# Altium PCB PCB.PcbDoc
Units mil, origin at the board's own origin, x right, y up, seen from the top; angles counter-clockwise.
Board outline 7375 x 8834 mil, 2 copper layers (Top Layer, Bottom Layer); 64 components, 131 nets, 608 pads, 12 vias.
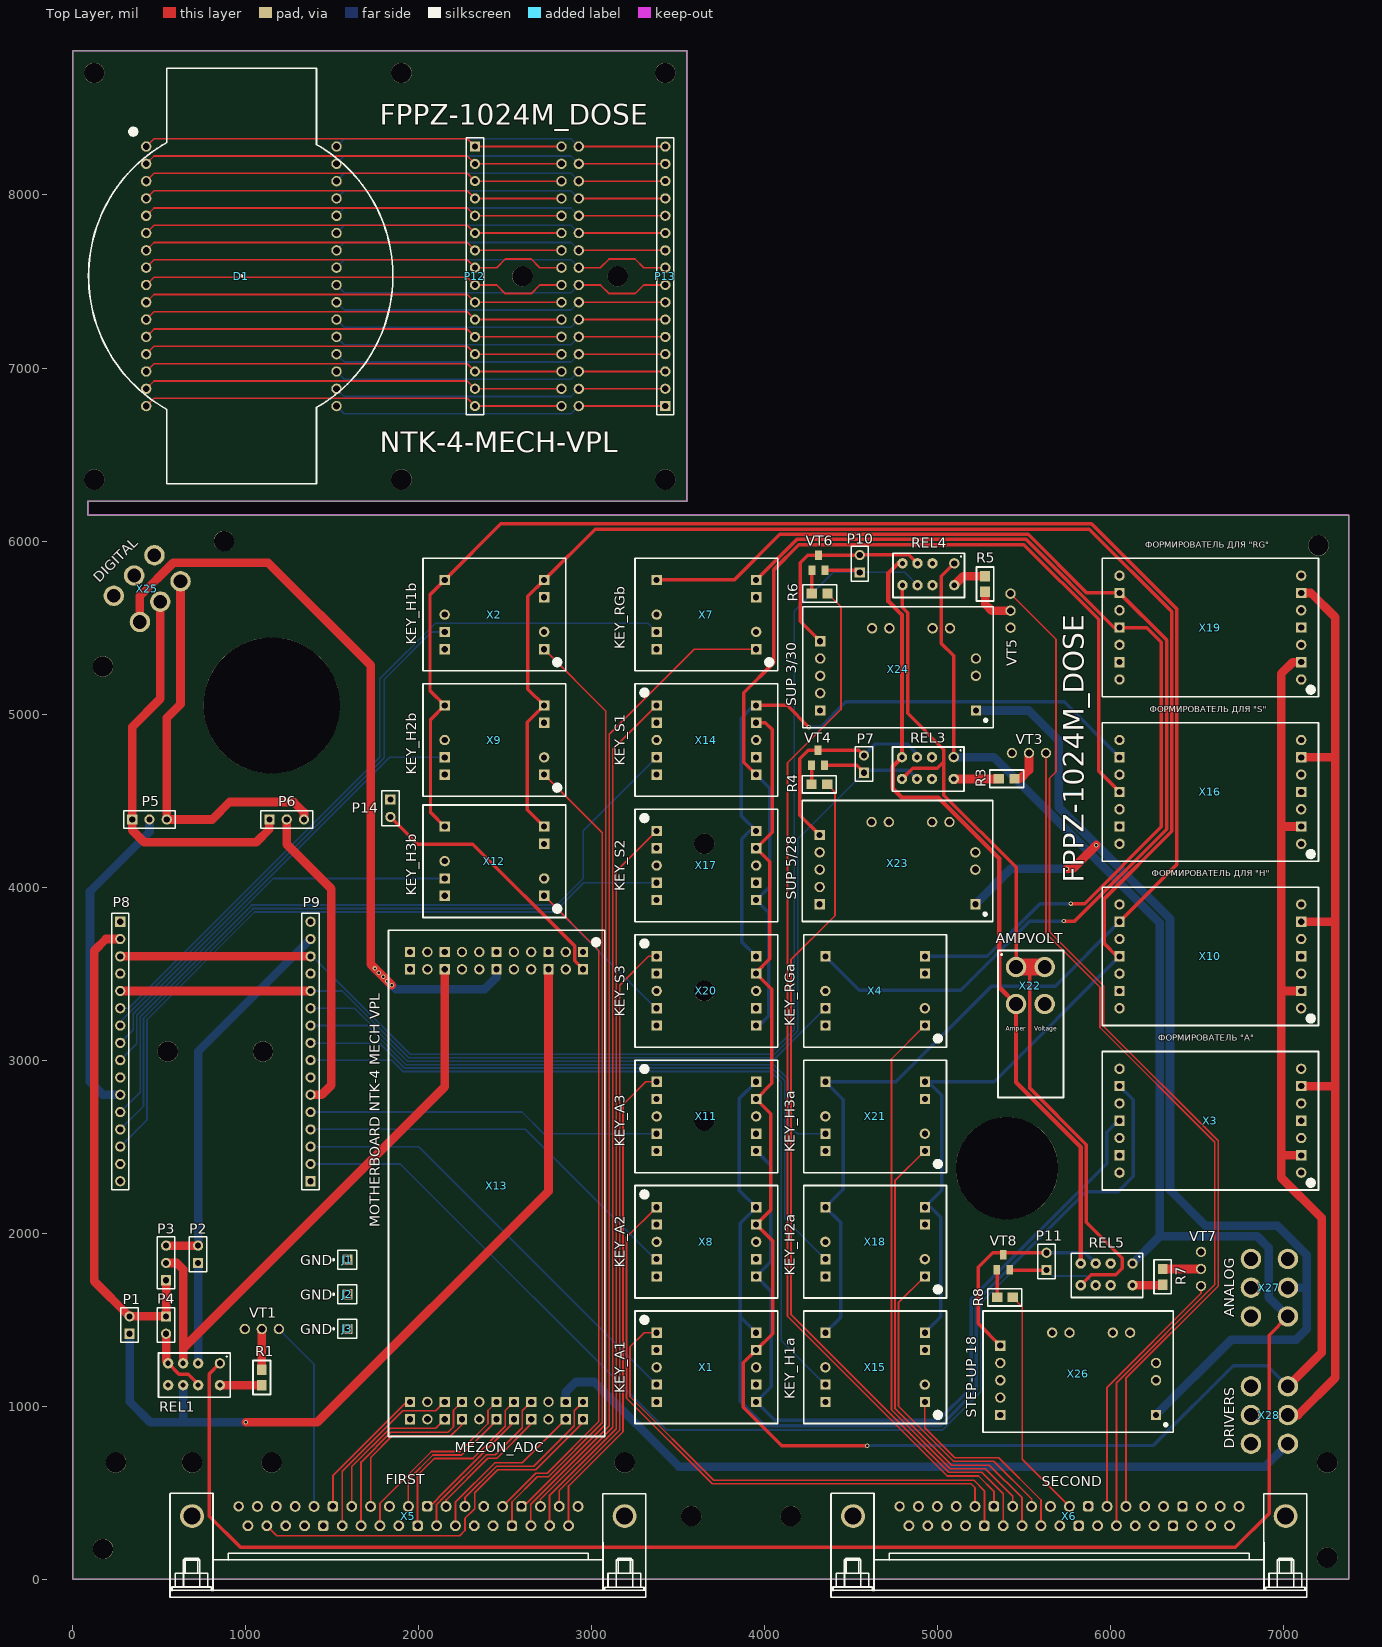
[diagram p0: Top Layer view]
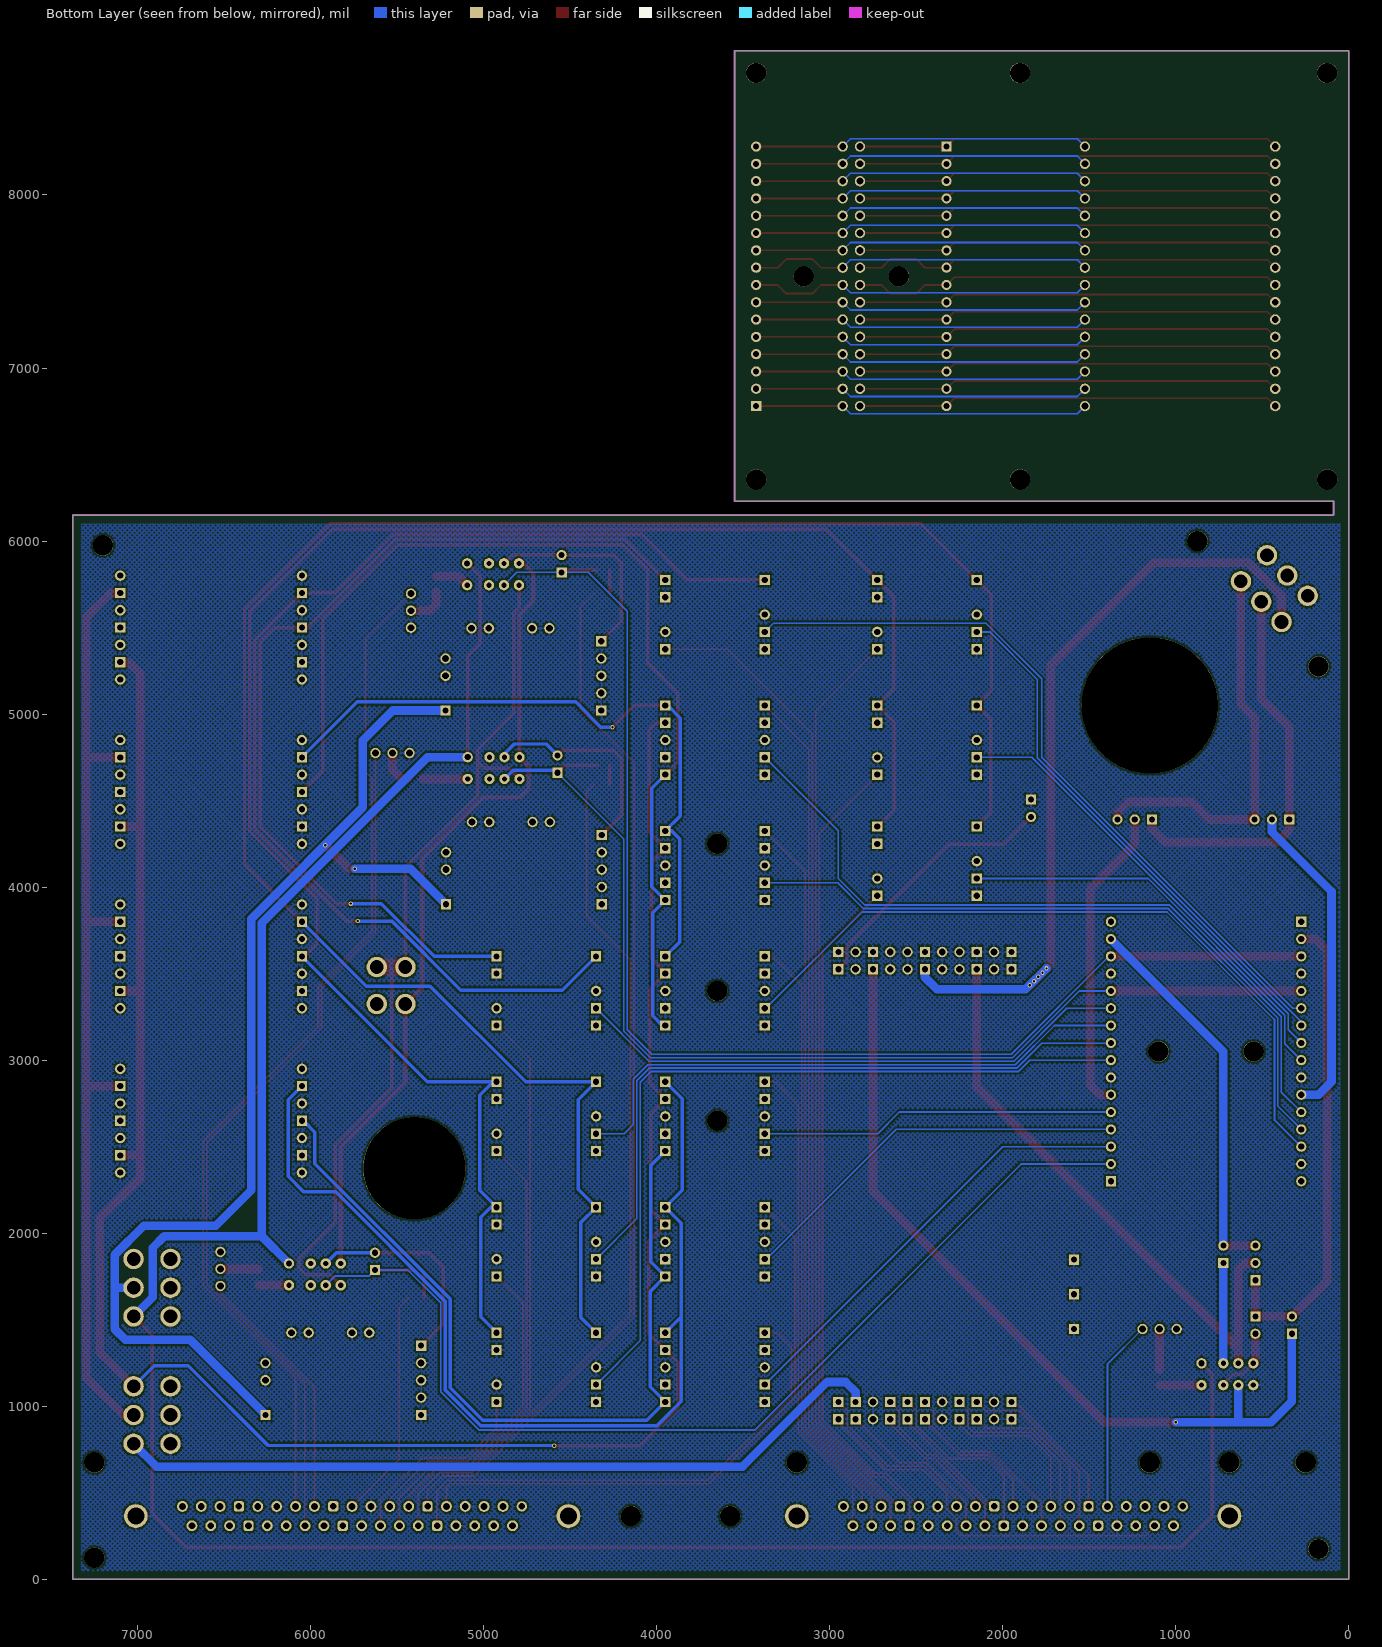
[diagram p1: Bottom Layer view, seen from below]

## Layer stack, top to bottom
Top Solder: solder mask 0.4, Solder Resist, Dk 3.5
Top Layer: signal copper 1.4
Dielectric 1: dielectric 12.6, FR-4, Dk 4.8
Bottom Layer: signal copper 1.4
Bottom Solder: solder mask 0.4, Solder Resist, Dk 3.5

## Board outline
0,0 0,8834 3550,8834 3550,6230 89,6230 88,6229 88,6151 89,6150 7375,6150 7375,0

## Design rules (kind name [scope] priority, off if disabled: settings)
Clearance [All] p1: gap=10
PolygonConnect [All] p1: connectstyle=Relief reliefconductorwidth=10 reliefentries=4 polygonreliefangle="90 Angle" airgapwidth=10
RoutingVias [All] p1: holewidth=28 width=50 viastyle="Through Hole" minholewidth=28 minwidth=50 maxholewidth=28 maxwidth=50
SolderMaskExpansion [All] p1: expansion=4
Width [All] p1: maxlimit=102.36 minlimit=5 preferedwidth=10
29 further rules are at their usual default settings.

## Classes and differential pairs
component class Sheet1: J1 J2 J3 P1 P2 P3 P4 P5 P6 P7 P8 P9 P14 R1 R3 R4 R5 R6 R7 R8 REL1 REL3 REL4 REL5 VT1 VT3 VT4 VT5 VT6 VT7 VT8 X1 X2 X3 X4 X5 X6 X7 X8 X9 X10 X11 X12 X13 X14 X15 X16 X17 X18 X19 X20 X21 X22 X23 X24 X25 X26 X27 X28
component class outdoor_plata: D1 P12 P13

## Components (designator, comment, footprint, x,y, rotation, side; value= is the part's Value field where it differs from the comment)
D1 "FPPZ 1024M" FPPZ_1024M 425,8280 r270 top
J1 "GND" PIN1 1588,1847 r90 top
J2 "GND" PIN1 1588,1647 r90 top
J3 "GND" PIN1 1588,1447 r90 top
P1 "Header 2" HDR1X2 329,1419 r90 top
P2 "Header 2" HDR1X2 725,1828 r90 top
P3 "Header 3" HDR1X3 540,1728 r90 top
P4 "Header 2" HDR1X2 540,1519 r270 top
P5 "Header 3" HDR1X3 344,4391 r0 top
P6 "Header 3" HDR1X3 1137,4391 r0 top
P7 "Header 2" HDR1X2 4573,4661.12 r90 top
P8 "Header 2" HDR1X16 275,3800 r270 top
P9 "Header 2" HDR1X16 1375,2300 r90 top
P10 "Header 2" HDR1X2 4549,5819 r90 top
P11 "Header 2" HDR1X2 5628,1787 r90 top
P12 "Header 16" HDR1X16 2325,8280 r270 top
P13 "Header 16" HDR1X16 3425,6780 r90 top
P14 "Header 2" HDR1X2 1836,4506 r270 top
R1 "51" RES 1142,1264 r180 top
R3 "51" RES 5300,4675 r270 top
R4 "100" RES 4412.86,4545 r90 top
R5 "51" RES 5322,5849 r180 top
R6 "100" RES 4415,5648 r90 top
R7 "51" RES 6250,1650 r0 top
R8 "100" RES 5485,1580 r90 top
REL1 "IM03TS" IM03TS 851,1248 r180 top
REL3 "IM03TS" IM03TS 5092,4751 r180 top
REL4 "IM03TS" IM03TS 5095,5871 r180 top
REL5 "IM03TS" IM03TS 6125,1825 r180 top
VT1 "КТ315" KT315 1192,1446 r180 top
VT3 "КТ315" KT315 5625,4775 r180 top
VT4 "IRLML0060TRPbF" SOT23-BEC_MMBT3640*(Primary) 4307,4747 r0 top
VT5 "КТ315" KT315 5420,5696 r270 top
VT6 "IRLML0060TRPbF" SOT23-BEC_MMBT3640*(Primary) 4310,5875 r0 top
VT7 "КТ315" KT315 6521,1695 r90 top
VT8 "IRLML0060TRPbF" SOT23-BEC_MMBT3640*(Primary) 5378,1832 r0 top
X1 "KEY_A1" MEZON_V 3375,1425 r0 top
X2 "KEY_H1b" MEZON_H 2725,5375 r180 top
X3 "ФОРМИРОВАТЕЛЬ \"A\"" MEZON_V+H 7100,2350 r180 top
X4 "KEY_RGa" MEZON_H 4925,3200 r180 top
X5 "FIRST" CHEAP_CONN_FEMALE 3190,365 r180 top
X6 "SECOND" CHEAP_CONN_FEMALE 7010,365 r180 top
X7 "KEY_RGb" MEZON_H 3950,5375 r180 top
X8 "KEY_A2" MEZON_V 3375,2150 r0 top
X9 "KEY_H2b" MEZON_H 2725,4650 r180 top
X10 "ФОРМИРОВАТЕЛЬ ДЛЯ \"Н\"" MEZON_V+H 7100,3300 r180 top
X11 "KEY_A3" MEZON_V 3375,2875 r0 top
X12 "KEY_H3b" MEZON_H 2725,3950 r180 top
X13 "MEZON_ADC" MEZON_ADC 2950,3625 r270 top
X14 "KEY_S1" MEZON_V 3375,5050 r0 top
X15 "KEY_H1a" MEZON_H 4925,1025 r180 top
X16 "ФОРМИРОВАТЕЛЬ ДЛЯ \"S\"" MEZON_V+H 7100,4250 r180 top
X17 "KEY_S2" MEZON_V 3375,4325 r0 top
X18 "KEY_H2a" MEZON_H 4925,1750 r180 top
X19 "ФОРМИРОВАТЕЛЬ ДЛЯ \"RG\"" MEZON_V+H 7100,5200 r180 top
X20 "KEY_S3" MEZON_V 3375,3600 r0 top
X21 "KEY_H3a" MEZON_H 4925,2475 r180 top
X22 "AMPVOLT" AMP_VOLTMETER 5452,3538 r0 top
X23 "SUP 5/28" MEZON_STEP-UP 5217,3901 r180 top
X24 "SUP 3/30" MEZON_STEP-UP 5220,5021 r180 top
X25 "DIGITAL" POWER 294,5862 r225 top
X26 "STEP-UP 18" MEZON_STEP-UP 6261,950 r180 top
X27 "ANALOG" POWER 6723,1685 r270 top
X28 "DRIVERS" POWER 6723,949 r270 top

## Footprints (in the part's own frame and the unit in brackets; to place one, negate y for a bottom-side part, rotate by r counter-clockwise, add the part's x,y. Pads: shape width x height; smd on the part's side, far side on the other; paste and mask are expansions set on the pad)
AMP_VOLTMETER [mm] "AMP_VOLTMETER"
  round 3 hole 2: 1(0,0) 2(0,-5.423) 3(4.2,-5.423) 4(4.2,0)
  silkscreen extent -2.66,-19.17 6.94,2.42
CHEAP_CONN_FEMALE [mm] "CHEAP_CONN_FEMALE"
  round 1.6 hole 1: 1(6.833,-1.422) 2(9.601,-1.422) 3(12.37,-1.422) 5(17.907,-1.422) 6(20.676,-1.422) 7(23.444,-1.422) 8(26.213,-1.422) 10(31.75,-1.422) 11(34.519,-1.422) 12(37.287,-1.422) 13(40.056,-1.422) 15(45.593,-1.422) 16(48.362,-1.422) 17(51.13,-1.422) 18(53.899,-1.422) 20(8.23,1.422) 21(10.998,1.422) 22(13.767,1.422) 24(19.304,1.422) 25(22.073,1.422) 26(24.841,1.422) 27(27.61,1.422) 29(33.147,1.422) 30(35.916,1.422) 31(38.684,1.422) 32(41.453,1.422) 34(46.99,1.422) 35(49.759,1.422) 36(52.527,1.422) 37(55.296,1.422)
  rrect50% 1.524x1.524 hole 0.965: 4(15.138,-1.422) 9(28.981,-1.422) 14(42.824,-1.422) 23(16.535,1.422) 28(30.378,1.422) 33(44.221,1.422)
  round 1.524 hole 0.965: 19(56.667,-1.422)
  round 3.5 hole 2.5: 38(0,0) 39(63.5,0)
  silkscreen extent -3.11,-3.36 66.72,11.92
FPPZ_1024M [mil]
  round 60 hole 39.37: 1(0,0) 2(100,0) 3(200,0) 4(300,0) 5(400,0) 6(500,0) 7(600,0) 8(700,0) 9(800,0) 10(900,0) 11(1000,0) 12(1100,0) 13(1200,0) 14(1300,0) 15(1400,0) 16(1500,0) 17(1500,1100) 18(1400,1100) 19(1300,1100) 20(1200,1100) 21(1100,1100) 22(1000,1100) 23(900,1100) 24(800,1100) 25(700,1100) 26(600,1100) 27(500,1100) 28(400,1100) 29(300,1100) 30(200,1100) 31(100,1100) 32(0,1100)
  silkscreen extent -453,-333 1949,1425
HDR1X2 [mm] "Connector; Header; 2 Position"
  rect 1.5x1.5 hole 0.9: 1(0,0)
  round 1.5 hole 0.9: 2(2.54,0)
  silkscreen extent -1.27,-1.27 3.81,1.27
HDR1X3 [mm] "Connector; Header; 3 Position"
  rect 1.5x1.5 hole 0.9: 1(0,0)
  round 1.5 hole 0.9: 2(2.54,0) 3(5.08,0)
  silkscreen extent -1.27,-1.27 6.35,1.27
HDR1X16 [mm] "Connector; Header; 16 Position"
  rect 1.5x1.5 hole 0.9: 1(0,0)
  round 1.5 hole 0.9: 2(2.54,0) 3(5.08,0) 4(7.62,0) 5(10.16,0) 6(12.7,0) 7(15.24,0) 8(17.78,0) 9(20.32,0) 10(22.86,0) 11(25.4,0) 12(27.94,0) 13(30.48,0) 14(33.02,0) 15(35.56,0) 16(38.1,0)
  silkscreen extent -1.27,-1.27 39.37,1.27
IM03TS [mil] "IM03TS"
  round 60 hole 35.43: 1(0,0)
  round 60 hole 30: 2(125.98,0) 3(212.6,0) 4(299.21,0) 5(299.21,125.98) 6(212.6,125.98) 7(125.98,125.98) 8(0,125.98)
  silkscreen extent -59,-59 354,197
KT315 [mil] "KT315"
  round 60 hole 39.37: 1(0,0) 2(98.43,0) 3(196.85,0)
MEZON_ADC [mm] "MEZON_ADC"
  rect 1.5x1.5 hole 0.9: 1(0,0) 2(2.54,0) 5(0,-5.08) 6(2.54,-5.08) 11(0,-12.7) 12(2.54,-12.7) 17(0,-20.32) 18(2.54,-20.32) 21(0,-25.4) 22(2.54,-25.4) 23(66.04,-25.4) 24(68.58,-25.4) 27(66.04,-20.32) 28(68.58,-20.32) 29(66.04,-17.78) 30(68.58,-17.78) 33(66.04,-12.7) 34(68.58,-12.7) 35(66.04,-10.16) 36(68.58,-10.16) 37(66.04,-7.62) 38(68.58,-7.62) 41(66.04,-2.54) 42(68.58,-2.54) 43(66.04,0) 44(68.58,0)
  round 1.524 hole 1: 3(0,-2.54) 4(2.54,-2.54) 7(0,-7.62) 8(2.54,-7.62) 9(0,-10.16) 10(2.54,-10.16) 13(0,-15.24) 14(2.54,-15.24) 15(0,-17.78) 16(2.54,-17.78) 19(0,-22.86) 20(2.54,-22.86) 25(66.04,-22.86) 26(68.58,-22.86) 31(66.04,-15.24) 32(68.58,-15.24) 39(66.04,-5.08) 40(68.58,-5.08)
  silkscreen extent -3.18,-28.57 71.12,3.18
MEZON_H [mm]
  rect 1.5x1.5 hole 0.9: 1(0,0) 3(0,-7.62) 4(0,-10.16) 5(14.605,-10.16) 7(14.605,-2.54) 8(14.605,0)
  round 1.524 hole 0.9: 2(0,-2.54) 6(14.605,-5.08)
  silkscreen extent -3.18,-13.33 17.78,3.18
MEZON_STEP-UP [mil] "MEZON_STEP-UP"
  rect 59.06x59.06 hole 35.43: 1(0,0) 8(900,-400) 12(900,0)
  round 60 hole 39.37: 2(0,-200) 3(0,-300) 4(150,-475) 5(250,-475) 6(500,-475) 7(600,-475) 9(900,-300) 10(900,-200) 11(900,-100)
  silkscreen extent -100,-600 1000,100
MEZON_V [mm]
  rect 1.5x1.5 hole 0.9: 1(0,0) 2(0,-2.54) 4(0,-7.62) 5(0,-10.16) 6(14.605,-10.16) 7(14.605,-7.62) 9(14.605,-2.54) 10(14.605,0)
  round 1.524 hole 0.9: 3(0,-5.08) 8(14.605,-5.08)
  silkscreen extent -3.17,-13.33 17.78,3.17
MEZON_V+H [mm] "MEZON_V+H"
  round 1.524 hole 0.9: 1(0,0) 3(0,-5.08) 5(0,-10.16) 7(0,-15.24) 8(26.67,-15.24) 10(26.67,-10.16) 12(26.67,-5.08) 14(26.67,0)
  rect 1.5x1.5 hole 0.9: 2(0,-2.54) 4(0,-7.62) 6(0,-12.7) 9(26.67,-12.7) 11(26.67,-7.62) 13(26.67,-2.54)
  silkscreen extent -2.54,-17.78 29.21,2.54
PIN1 [mm] "Connector; Plug"
  rect 1.5x1.5 hole 0.9: 1(0,0)
  silkscreen extent -1.4,-1.4 1.4,2.17
POWER [mm] "POWER"
  round 3 hole 2: 1(4.218,7.62) 2(0,7.62) 3(-4.218,7.62) 4(4.218,2.198) 5(0,2.198) 6(-4.218,2.198)
RES [mil] "FROM_MAX"
  rect 55.98x60 smd: 1(49,52.71) 2(49,142.71)
  silkscreen extent -1,0 99,196, body extent 17,19 81,177, height 100
SOT23-BEC_MMBT3640*(Primary) [mm]
  rect 1x1.4 smd: 1(-0.95,-1.1) 2(0.95,-1.1) 3(0,1.1)

## Part data
J1 J2 J3: library part Socket, "Socket"
P1 P2 P4 P7 P10 P11 P14: "Header, 2-Pin"
P3 P5 P6: "Header, 3-Pin"
P8 P9: library part "Header 16", "Header, 16-Pin"
P12 P13: "Header, 16-Pin"
R1 R3 R4 R5 R6 R7 R8: library part RES
X1 X8 X11 X14 X17 X20: library part MEZON_V
X2 X4 X7 X9 X12 X15 X18 X21: library part MEZON_H
X3 X10 X16 X19: library part MEZON_V+H
X5 X6: library part CHEAP_CON_37_FEMALE
X22: library part AMP_VOLTMETER
X23 X24 X26: library part MEZON_STEP-UP
X25 X27 X28: library part POWER

## Free pads (board coordinates)
  round 118.11 hole 118.11 unplated: 0(125,6355) 0(125,8705) 0(175,175) 0(175,5275) 0(250,675) 0(550,3050) 0(690,675) 0(875,6000) 0(1100,3050) 0(1150,675) 0(1900,6355) 0(1900,8705) 0(2600,7530) 0(3150,7530) 0(3190,675) 0(3425,6355) 0(3425,8705) 0(3575,365) 0(3650,2650) 0(3650,3400) 0(3650,4250) 0(4150,365) 0(7200,5975) 0(7250,125) 0(7250,675)
  round 787.4 hole 787.4 unplated: 0(1150,5050)
  round 60 hole 39.37: 0(2825,6780) 0(2825,6880) 0(2825,6980) 0(2825,7080) 0(2825,7180) 0(2825,7280) 0(2825,7380) 0(2825,7480) 0(2825,7580) 0(2825,7680) 0(2825,7780) 0(2825,7880) 0(2825,7980) 0(2825,8080) 0(2825,8180) 0(2825,8280) 0(2925,6780) 0(2925,6880) 0(2925,6980) 0(2925,7080) 0(2925,7180) 0(2925,7280) 0(2925,7380) 0(2925,7480) 0(2925,7580) 0(2925,7680) 0(2925,7780) 0(2925,7880) 0(2925,7980) 0(2925,8080) 0(2925,8180) 0(2925,8280)
  round 590.55 hole 590.55 unplated: 0(5400,2375)

## Via types
v1: diameter 25.59, hole 13.78, Top Layer to Bottom Layer, 12 vias

## Nets (pads, with @x,y where several pads share a name; then routed paths per layer and width w, separated by ;. In a path a pad name is that pad's centre, name@x,y a point inside that pad or via, vN(x,y) a via of type N, cw(c..) or ccw(c..) an arc to the next point about the centre after c; other vN are vias at no path point)
"AMPER_3 AND 30": VT5.1 X6.7 | length 6024.3
  Top Layer w10: VT5.1 5683,5433 5683,4667 5645,4629 5645,3742 5957,3430 5957,3197 6620,2534 6620,1695 6087,1162 X6.7
"AMPER_5 AND 28": VT3.1 X6.26 | length 5104.7
  Top Layer w10: VT3.1 5625,3733.72 5937,3421.72 5937,3188.72 6600,2525.72 6600,1703.28 6033,1136.28 X6.26@6033,309
AMPER_18: VT7.1 X6.8 | length 1498.9
  Top Layer w10: X6.8 5978,1109.57 6521,1652.57 VT7.1
AMPER_+: REL3.4 REL4.4 REL5.4 X22.2 | length 4722.6
  Top Layer w25: REL4.4 4770,5871 4714,5815 4714,5652 4792.79,5573.21 REL3.4 4740.29,4698.5 4740.29,4568.71 4791,4518 5002.04,4518 5355,4165.04 5355,3421.5 X22.2 5452,2872 5825.79,2498.21 REL5.4
AMPER_-: REL3.5 REL4.5 REL5.5 X22.1 X22.4 | length 5174.1
  Top Layer w20: REL3.5 4854.77,4687 4997,4687 5035,4725 ; REL4.5 4795,5744.23 4795,5616.96 4825.29,5586.67 4825.29,5004 5035,4794.29 5035,4725 ; X22.1 5452,4114 5035,4531 5035,4725 ; 5538,3538 5531.06,3531.06 5531.06,2838.91 5858.29,2511.67 5858.29,2062.71 6066,1855 6066,1798 6028,1760 5886.77,1760 REL5.5
  Top Layer w100: X22.1 5538,3538 X22.4
"DIRECTLY_3 AND 30": R6.1 X6.14 | length 6035.6
  Top Layer w10: R6.1 4440,5619.29 4440,5027 4131,4718 4131,1521 5055,597 5234.72,597 5324,507.72 X6.14
"DIRECTLY_5 AND 28": R4.1 X6.32 | length 5028.6
  Top Layer w10: R4.1 4406,4548.15 4406,3835 4151,3580 4151,1532 5064.08,618.92 5253.08,618.92 5378,494 X6.32
DIRECTLY_18: R8.1 X6.10 | length 1343.7
  Top Layer w10: R8.1 5488,1573.29 5488,693 X6.10
GND: J1.1 J2.1 J3.1 P8.4 P8.10 P8.15 P9.7 P9.13 P14.1 REL1.5 VT1.3 VT3.3 VT5.3 VT7.3 X1.2 X1.3 X1.5 X1.7 X1.8 X2.2 X2.3 X2.6 X2.8 X3.1 X3.3 X3.4 X3.5 X3.7 X3.8 X3.10 X3.12 X3.13 X3.14 X4.2 X4.3 X4.6 X4.8 X5.6 X5.11 X5.16 X5.24 X5.29 X5.34 X5.38 X5.39 X6.6 X6.11 X6.16 X6.24 X6.29 X6.34 X6.38 X6.39 X7.2 X7.3 X7.6 X7.8 X8.2 X8.3 X8.5 X8.7 X8.8 X9.2 X9.3 X9.6 X9.8 X10.1 X10.3 X10.4 X10.5 X10.7 X10.8 X10.10 X10.12 X10.13 X10.14 X11.2 X11.3 X11.5 X11.7 X11.8 X12.2 X12.3 X12.6 X12.8 X13.1 X13.3 X13.4 X13.5 X13.7 X13.8 X13.9 X13.10 X13.11 X13.13 X13.14 X13.15 X13.16 X13.17 X13.19 X13.20 X13.21 X13.22 X13.24 X13.25 X13.26 X13.31 X13.32 X13.39 X13.40 X14.2 X14.3 X14.5 X14.7 X14.8 X15.2 X15.3 X15.6 X15.8 X16.1 X16.3 X16.4 X16.5 X16.7 X16.8 X16.10 X16.12 X16.13 X16.14 X17.2 X17.3 X17.5 X17.7 X17.8 X18.2 X18.3 X18.6 X18.8 X19.1 X19.3 X19.4 X19.5 X19.7 X19.8 X19.10 X19.12 X19.13 X19.14 X20.2 X20.3 X20.5 X20.7 X20.8 X21.2 X21.3 X21.6 X21.8 X23.2 X23.3 X23.4 X23.5 X23.6 X23.7 X23.9 X23.10 X23.11 X23.12 X24.2 X24.3 X24.4 X24.5 X24.6 X24.7 X24.9 X24.10 X24.11 X24.12 X25.4 X25.5 X25.6 X26.2 X26.3 X26.4 X26.5 X26.6 X26.7 X26.9 X26.10 X26.11 X26.12 X27.4 X27.5 X27.6 X28.4 X28.5 X28.6
HIGH_A: X1.10 X3.9 X8.10 X11.10 | length 5879.2
  Bottom Layer w20: X1.10 3858,1517 ; X11.10 3851,2776 3851,2249 X8.10 3858,2058 3858,1517 ; X3.9 6130,2770 6130,2328 6041,2239 5854.64,2239 5223,1607.36 5223,1094.57 5016.43,888 3998,888 3858,1028 3858,1517
HIGH_H: X2.5 X9.5 X10.9 X12.5 X15.5 X18.5 X21.5 | length 11768.2
  Top Layer w20: X12.5 2068,4432 2068,4968 X9.5 2065,5135 2065,5690 X2.5 2474.19,6099.19 5887.81,6099.19 6382,5605 6382,4132 X10.9
  Bottom Layer w20: X15.5 4438,1513 4438,2062 X18.5 4453,2253 4453,2772 X21.5 4757,2875 5310,3428 5678,3428 X10.9
HIGH_RG: X4.5 X7.5 X19.9 | length 6847.2
  Top Layer w20: X7.5 3823,5775 4087.19,6039.19 5522.24,6039.19 5861.43,5700 X19.9 6322,5428 6322,4335.57 5790.43,3804 v1(5727,3804)
  Bottom Layer w20: X4.5@4350,3607 X4.5 4545,3405 5133,3405 5532,3804 v1(5727,3804)
HIGH_S: X14.10 X16.9 X17.10 X20.10 | length 3963.5
  Top Layer w20: X14.10 4130,5050 v1(4255,4925)
  Bottom Layer w20: X20.10 3867,3683 3867,4278 3914,4325 X17.10 3864,4411 3864,4977 3937,5050 X14.10 ; v1(4255,4925) 4323.06,4925 4468.58,5070.53 5729.47,5070.53 X16.9
LOW_A: X1.6 X3.11 X8.6 X11.6 | length 4860.5
  Bottom Layer w20: X11.6 4034,2391 4034,1834 X8.6 4037,1663 4037,1112 X1.6 4057,918 5004,918 5193,1107 5193,1619.78 5975,2401.78 5975,2584 6041,2650 X3.11
LOW_H: X2.4 X9.4 X10.11 X12.4 X15.4 X18.4 X21.4 | length 10771.5
  Top Layer w20: X12.4 2628,4447 2628,4953 X9.4 2631,5144 2631,5681 X2.4 3019.19,6069.19 5875.39,6069.19 6352,5592.57 6352,4323.15 5963,3934.15 5963,3672 6035,3600 X10.11
  Bottom Layer w20: X15.4 5017,1517 5017,2092 4959,2150 X18.4 5022,2247 5022,2798 X21.4@4945,2875 ; X21.4 X21.4@4945,2875 ; X10.11 5325,2875 X21.4@4945,2875
LOW_RG: X4.4 X7.4 X19.11 | length 5429.3
  Top Layer w20: X7.4 4184.19,6009.19 5509.81,6009.19 6019,5500 X19.11 6207.57,5500 6292,5415.57 6292,4348 5849,3905 v1(5768,3905)
  Bottom Layer w20: X4.4 5285.57,3600 5590.57,3905 v1(5768,3905)
LOW_S: X14.6 X16.11 X17.6 X20.6 | length 6034.9
  Top Layer w20: X14.6 3878,4722 3878,5123 4053,5298 4053,5835.57 4196.61,5979.19 5497.39,5979.19 5929,5547.57 5929,4671 X16.11
  Bottom Layer w20: X20.6 3967,3200 4023,3256 4023,3852 X17.6 4028,4003 4028,4572 X14.6
NetP2_1: P2.1 REL1.2 | length 580
  Bottom Layer w50: REL1.2 P2.1
NetP4_2: P4.2 REL1.4 REL1.7 | length 404.2
  Top Layer w20: REL1.4 614.79,1185 667,1185 725.02,1126.98 REL1.7
  Top Layer w50: P4.2 540,1259.79 REL1.4
NetP7_2: P7.2 REL3.3 VT4.3 X23.8 | length 1268.1
  Top Layer w20: X23.8 4203,4415 4203,4743 4250.31,4790.31 VT4.3 4543.81,4790.31 P7.2
  Bottom Layer w20: P7.2 4638.88,4827 4824,4827 4879.4,4771.6 REL3.3
NetP10_2: P10.2 REL4.3 VT6.3 X24.8 | length 1220.2
  Top Layer w20: X24.8 4204,5537 4204,5875 4247.31,5918.31 VT6.3 4548.31,5918.31 P10.2 4551,5921 4832.4,5921 REL4.3
NetP11_2: P11.2 REL5.3 VT8.3 X26.8 | length 1249.2
  Top Layer w20: X26.8 5233,1478 5233,1802 5318,1887 5366.31,1887 VT8.3 ; VT8.3@5379,1887 P11.2
  Bottom Layer w20: P11.2 5850.4,1887 REL5.3
NetR1_1: R1.1 VT1.2 | length 234.9
  Top Layer w50: R1.1 1093.57,1211.87 VT1.2
NetR1_2: R1.2 REL1.8 | length 242.3
  Top Layer w50: REL1.8 1092.28,1122.02 R1.2
NetR3_1: R3.1 REL3.8 | length 261.1
  Top Layer w50: REL3.8 5351.72,4625.02 R3.1
NetR3_2: R3.2 VT3.2 | length 203.2
  Top Layer w50: R3.2 5476,4626 5526.57,4676.57 VT3.2
NetR4_2: R4.2 VT4.1 | length 109.9
  Top Layer w20: VT4.1 4270.15,4703.14 R4.2
NetR5_1: R5.1 REL4.8 | length 199.2
  Top Layer w50: REL4.8 5146.28,5796.29 R5.1
NetR5_2: R5.2 VT5.2 | length 233.2
  Top Layer w50: R5.2 5273,5636 5311.43,5597.57 VT5.2
NetR6_2: R6.2 VT6.1 | length 134.8
  Top Layer w20: R6.2 4272.29,5831.39 VT6.1
NetR7_1: R7.1 REL5.8 | length 175.5
  Top Layer w50: REL5.8 6295.31,1699.02 R7.1
NetR7_2: R7.2 VT7.2 | length 222.3
  Top Layer w50: R7.2 6520.28,1792.71 VT7.2
NetR8_2: R8.2 VT8.1 | length 134
  Top Layer w20: VT8.1@5341.6,1762.69 5342.29,1762 R8.2
OUT_A1: D1.19 P13.3 pad.0@2925,6980 | length 1937.3
  Top Layer w10: pad.0@2925,6980 P13.3
  Bottom Layer w10: D1.19 1570,6935 2880,6935 pad.0@2925,6980
OUT_A2: D1.20 P13.4 pad.0@2925,7080 | length 1937.3
  Top Layer w10: pad.0@2925,7080 P13.4
  Bottom Layer w10: D1.20 1570,7035 2880,7035 pad.0@2925,7080
OUT_A3: D1.21 P13.5 pad.0@2925,7180 | length 1937.3
  Top Layer w10: pad.0@2925,7180 P13.5
  Bottom Layer w10: D1.21 1570,7135 2880,7135 pad.0@2925,7180
OUT_CGA: D1.29 P13.13 pad.0@2925,7980 | length 1937.3
  Top Layer w10: pad.0@2925,7980 P13.13
  Bottom Layer w10: D1.29 1570,8025 2880,8025 pad.0@2925,7980
OUT_CGB: D1.4 P12.4 pad.0@2825,7980 | length 2437.3
  Top Layer w10: D1.4 470,8025 2280,8025 P12.4 pad.0@2825,7980
OUT_DDA: D1.30 P13.14 pad.0@2925,8080 | length 1937.3
  Top Layer w10: pad.0@2925,8080 P13.14
  Bottom Layer w10: D1.30 1570,8125 2880,8125 pad.0@2925,8080
OUT_H1A: D1.24 P13.8 pad.0@2925,7480 | length 1978.7
  Top Layer w10: pad.0@2925,7480 3050,7480 3100,7430 3250,7430 3300,7480 P13.8
  Bottom Layer w10: D1.24 1570,7435 2880,7435 pad.0@2925,7480
OUT_H1B: D1.7 P12.7 pad.0@2825,7680 | length 2437.3
  Top Layer w10: D1.7 470,7725 2280,7725 P12.7 pad.0@2825,7680
OUT_H2A: D1.25 P13.9 pad.0@2925,7580 | length 1978.7
  Top Layer w10: pad.0@2925,7580 3050,7580 3100,7630 3250,7630 3300,7580 P13.9
  Bottom Layer w10: D1.25 1570,7625 2880,7625 pad.0@2925,7580
OUT_H2B: D1.8 P12.8 pad.0@2825,7580 | length 2478.7
  Top Layer w10: D1.8 470,7625 2280,7625 P12.8 2450,7580 2500,7630 2650,7630 2700,7580 pad.0@2825,7580
OUT_H3A: D1.26 P13.10 pad.0@2925,7680 | length 1937.3
  Top Layer w10: pad.0@2925,7680 P13.10
  Bottom Layer w10: D1.26 1570,7725 2880,7725 pad.0@2925,7680
OUT_H3B: D1.9 P12.9 pad.0@2825,7480 | length 2478.7
  Top Layer w10: D1.9 470,7525 2280,7525 P12.9 2450,7480 2500,7430 2650,7430 2700,7480 pad.0@2825,7480
OUT_OBA: D1.22 P13.6 pad.0@2925,7280 | length 1937.3
  Top Layer w10: pad.0@2925,7280 P13.6
  Bottom Layer w10: D1.22 1570,7235 2880,7235 pad.0@2925,7280
OUT_OBB: D1.11 P12.11 pad.0@2825,7280 | length 2437.3
  Top Layer w10: D1.11 470,7325 2280,7325 P12.11 pad.0@2825,7280
OUT_OOB: D1.3 P12.3 pad.0@2825,8080 | length 2437.3
  Top Layer w10: D1.3 470,8125 2280,8125 P12.3 pad.0@2825,8080
OUT_OSA: D1.31 P13.15 pad.0@2925,8180 | length 1937.3
  Top Layer w10: pad.0@2925,8180 P13.15
  Bottom Layer w10: D1.31 1570,8225 2880,8225 pad.0@2925,8180
OUT_OSB: D1.2 P12.2 pad.0@2825,8180 | length 2437.3
  Top Layer w10: D1.2 470,8225 2280,8225 P12.2 pad.0@2825,8180
OUT_PD: D1.18 P13.2 pad.0@2925,6880 | length 1937.3
  Top Layer w10: pad.0@2925,6880 P13.2
  Bottom Layer w10: D1.18 1570,6835 2880,6835 pad.0@2925,6880
OUT_RDA: D1.28 P13.12 pad.0@2925,7880 | length 1937.3
  Top Layer w10: pad.0@2925,7880 P13.12
  Bottom Layer w10: D1.28 1570,7925 2880,7925 pad.0@2925,7880
OUT_RDB: D1.5 P12.5 pad.0@2825,7880 | length 2437.3
  Top Layer w10: D1.5 470,7925 2280,7925 P12.5 pad.0@2825,7880
OUT_RGA: D1.27 P13.11 pad.0@2925,7780 | length 1937.3
  Top Layer w10: pad.0@2925,7780 P13.11
  Bottom Layer w10: D1.27 1570,7825 2880,7825 pad.0@2925,7780
OUT_RGB: D1.6 P12.6 pad.0@2825,7780 | length 2437.3
  Top Layer w10: D1.6 470,7825 2280,7825 P12.6 pad.0@2825,7780
OUT_S1: D1.12 P12.12 pad.0@2825,7180 | length 2437.3
  Top Layer w10: D1.12 470,7225 2280,7225 P12.12 pad.0@2825,7180
OUT_S2: D1.13 P12.13 pad.0@2825,7080 | length 2437.3
  Top Layer w10: D1.13 470,7125 2280,7125 P12.13 pad.0@2825,7080
OUT_S3: D1.14 P12.14 pad.0@2825,6980 | length 2437.3
  Top Layer w10: D1.14 470,7025 2280,7025 P12.14 pad.0@2825,6980
OUT_SS1: D1.10 P12.10 pad.0@2825,7380 | length 2437.3
  Top Layer w10: D1.10 470,7425 2280,7425 P12.10 pad.0@2825,7380
OUT_SS2: D1.15 P12.15 pad.0@2825,6880 | length 2437.3
  Top Layer w10: D1.15 470,6925 2280,6925 P12.15 pad.0@2825,6880
OUT_SS3: D1.23 P13.7 pad.0@2925,7380 | length 1937.3
  Top Layer w10: pad.0@2925,7380 P13.7
  Bottom Layer w10: D1.23 1570,7335 2880,7335 pad.0@2925,7380
OUT_TEM+: D1.17 P13.1 pad.0@2925,6780 | length 1937.3
  Top Layer w10: pad.0@2925,6780 P13.1
  Bottom Layer w10: D1.17 1570,6735 2880,6735 pad.0@2925,6780
OUT_TEM-: D1.16 P12.16 pad.0@2825,6780 | length 2437.3
  Top Layer w10: D1.16 470,6825 2280,6825 P12.16 pad.0@2825,6780
OUT_TR1: D1.1 P12.1 pad.0@2825,8280 | length 2437.3
  Top Layer w10: D1.1 470,8325 2280,8325 P12.1 pad.0@2825,8280
OUT_TR2: D1.32 P13.16 pad.0@2925,8280 | length 1937.3
  Top Layer w10: pad.0@2925,8280 P13.16
  Bottom Layer w10: D1.32 1570,8325 2880,8325 pad.0@2925,8280
P0.0: VT1.1 X5.15 | length 1118.7
  Top Layer w10: X5.15@1391,421 1395,425 X5.15
  Bottom Layer w10: VT1.1 1395,1243 X5.15
P0.0_2: X6.15 X8.1 | length 3511.7
  Top Layer w10: X8.1 3201,1976 3201,1046.52 3695.52,552 5191.72,552 5215,528.72 X6.15
P0.1: X5.33
P0.1_2: X1.1 X6.33 | length 2951.3
  Top Layer w10: X1.1 3303,1425 3221,1343 3221,1056 3705,572 5209,572 5269,512 X6.33
P0.2: X5.14 X13.23 | length 800.5
  Top Layer w10: X5.14 1504,599 1930,1025 X13.23
P0.3: X5.32 X13.27 | length 1073.5
  Top Layer w10: X5.32 1558,624.72 1907.28,974 2099,974 X13.27
P0.4: X5.13 X13.28 | length 880.7
  Top Layer w10: X5.13 1613,651.43 1834.57,873 2098,873 X13.28
P0.4_2: X4.1 X6.13 | length 3267.3
  Top Layer w10: X4.1 4732,3007 4732,979.28 5072.36,638.92 5273.8,638.92 5433,479.72 X6.13
P0.5: X5.31 X13.29 | length 1150.9
  Top Layer w10: X5.31 1667,677.15 1838.85,849 2169,849 2201,881 2201,976 X13.29
P0.5_2: X6.31 X21.1 | length 2669.5
  Top Layer w10: X21.1 4752,2302 4752,987.57 5080.65,658.92 5298.08,658.92 5487,470 X6.31
P0.6: X5.12 X13.30 | length 920.6
  Top Layer w10: X5.12 1722,703.86 1847.14,829 2185,829 2250,894 X13.30
P0.6_2: X6.12 X18.1 | length 1847.8
  Top Layer w10: X18.1 4772,1597 4772,1001 5090.44,682.56 5323.44,682.56 5542,464 X6.12
P0.7: X5.30 X13.33 | length 1091.2
  Top Layer w10: X5.30 1776,440 2074,738 2238,738 2400,900 2400,975 X13.33
P0.7_2: X6.30 X15.1 | length 1142
  Top Layer w10: X15.1 4925,876.28 5098.72,702.56 5351.44,702.56 5596,458 X6.30
P1.0: X5.10 X13.34 | length 813
  Top Layer w10: X5.10 1940,575.72 2082.28,718 2249.17,718 2450,918.83 X13.34
P1.1: X5.28 X13.35 | length 1077.3
  Top Layer w10: X5.28 1993.14,309.86 1993.14,600.57 2090.57,698 2313,698 2500,885 2500,975 X13.35
P1.2: X5.9 X13.36 | length 720.7
  Top Layer w10: X5.9 2064.28,421 2091.5,448.22 2091.5,448.54 2130.46,487.5 2130.78,487.5 2550,906.72 X13.36
P1.3: X5.27 X13.37 | length 972.9
  Top Layer w10: X5.27 2103,431.43 2111.5,439.94 2111.5,440.26 2138.74,467.5 2139.06,467.5 2391.57,720 2443,720 2599,876 2599,974 X13.37
P1.4: X5.8 X13.38 | length 738.4
  Top Layer w10: X5.8 2158,458.15 2399.85,700 2452.17,700 2650,897.83 X13.38
P1.5: X5.26 X13.42 | length 972.2
  Top Layer w10: X5.26 2212,444 2441,673 2598,673 X13.42
P1.6: X5.7 X13.43 | length 1013.3
  Top Layer w10: X5.7 2267,470.72 2449.28,653 2665,653 2899,887 2899,974 X13.43
P2.0: X5.5 X12.1 | length 3928.3
  Top Layer w10: X5.5 2677,613 2742.01,613 3041,911.99 3041,3634 X12.1
P2.1: X5.23 X9.1 | length 4734.5
  Top Layer w10: X5.23 2539,446.72 2685.28,593 2750.29,593 3061,903.71 3061,4314 X9.1
P2.2: X2.1 X5.4 | length 5310.6
  Top Layer w10: X5.4 2606.58,421 3081,895.42 3081,5018 2725,5374 X2.1
P2.3: X5.22 X7.1 | length 5815
  Top Layer w10: X5.22 2648,434.14 3101,887.14 3101,4884 3592,5375 X7.1
P2.4: X5.3 X14.1 | length 4907.4
  Top Layer w10: X5.3 2703,460.85 3121,878.85 3121,4796 X14.1
P2.5: X5.21 X17.1 | length 4272.6
  Top Layer w10: X5.21 2756.22,309.78 2756.22,485.78 3141,870.57 3141,4091 X17.1
P2.6: X5.2 X20.1 | length 3439.7
  Top Layer w10: X5.2 2812,513.28 3161,862.28 3161,3433 3328,3600 X20.1
P2.7: X5.20 X11.1 | length 2813.7
  Top Layer w10: X5.20 2866,539 3181,854 3181,2744 3312,2875 X11.1
PFI1: X5.36 X13.44 | length 2234.8
  Top Layer w10: X5.36 1179,252 2237,252 2267,282 2267,351 2324,408 2324,499.43 2457.57,633 2675.75,633 2950,907.25 X13.44
PH_A1: P9.3 X1.4 | length 2569.5
  Bottom Layer w10: P9.3 2000,2500 X1.4
PH_A2: P9.4 X8.4 | length 2310.7
  Bottom Layer w10: P9.4 2616,2600 3366,1850 X8.4
PH_A3: P9.5 X11.4 | length 2051.8
  Bottom Layer w10: P9.5 2597,2700 2722,2575 X11.4
PH_DDA: P8.3 P9.14 P10.1 REL4.6 VT6.2 | length 7649
  Top Layer w20: VT6.2 4536.31,5831.69 P10.1
  Top Layer w50: P8.3 P9.14
  Bottom Layer w10: P9.14 1385.57,3600 1951.57,3034 4027.43,3034 4170,3176.57 4170,5594 4395,5819 P10.1 4808.42,5819 REL4.6
PH_H1A: P9.8 X15.7 | length 4626.2
  Bottom Layer w10: P9.8 1844.15,3000 1910.15,2934 4034,2934 4095,2873 4095,1380 X15.7
PH_H1B: P8.7 X2.7 | length 3095.6
  Bottom Layer w10: P8.7 275,3221.72 1800,4746.72 1800,5200 2075,5475 X2.7
PH_H2A: P9.9 X18.7 | length 3959.2
  Bottom Layer w10: P9.9 1377.28,3097.72 1774.72,3097.72 1918.43,2954 4042.28,2954 4115,2881.28 4115,2085 X18.7
PH_H2B: P8.8 X9.7 | length 2613.2
  Bottom Layer w10: P8.8 350,3175 350,3268.43 1831.57,4750 X9.7
PH_H3A: P9.10 X21.7 | length 3387.1
  Bottom Layer w10: P9.10 1700.72,3200 1926.72,2974 4050.57,2974 4135,2889.57 4135,2628 4188,2575 X21.7
PH_H3B: P8.9 X12.7 | length 2406.7
  Bottom Layer w10: P8.9 370,3095 370,3260.15 1159.85,4050 X12.7
PH_OBA: P6.2 P9.6 | length 1784.2
  Top Layer w50: P6.2 1237,4247 1494,3990 1494,2855 1439,2800 P9.6
PH_OBB: P5.2 P8.11 | length 1864.6
  Bottom Layer w50: P8.11 175,2800 100,2875 100,3975 444,4319 P5.2
PH_OSA: P2.2 P3.3 P9.15 | length 2226.2
  Top Layer w50: P3.3 P2.2
  Bottom Layer w50: P2.2 725,3050 P9.15
PH_OSB: P1.2 P3.1 P4.1 P8.2 | length 2795.7
  Top Layer w50: P8.2 193,3700 125,3632 125,1723 P1.2 P4.1 P3.1
PH_PD: P9.2 P11.1 REL5.6 VT8.2 | length 6106.9
  Top Layer w20: VT8.2@5415.4,1787 P11.1
  Bottom Layer w10: P9.2 1894,2400 3431,863 5028,863 5248,1083 5248,1597 5438,1787 P11.1 5663,1752 5859.42,1752 REL5.6
PH_RDA: P7.1 P8.5 P9.12 REL3.6 VT4.2 | length 6369.4
  Top Layer w20: VT4.2 4530.43,4703.69 P7.1
  Top Layer w50: P8.5 P9.12
  Bottom Layer w10: P9.12 1557.28,3400 1943.28,3014 4035.72,3014 4190,3168.28 4190,4278.12 P7.1
  Bottom Layer w20: P7.1 4586.9,4675.02 4829.4,4675.02 REL3.6
PH_RGA: P9.11 X4.7 | length 3228.5
  Bottom Layer w10: P9.11 1629,3300 1935,2994 4044,2994 X4.7
PH_RGB: P8.6 X7.7 | length 4307.9
  Bottom Layer w10: P8.6 325,3300 1775,4750 1775,5203.28 2096.72,5525 3325,5525 X7.7
PH_S1: P8.12 X14.4 | length 4366.1
  Bottom Layer w10: P8.12 390,2815 390,3251.86 1034.14,3896 2796,3896 2950,4050 2950,4325 X14.4
PH_S2: P8.13 X17.4 | length 3988.2
  Bottom Layer w10: P8.13 410,2735 410,3243.58 1042.42,3876 2804.28,3876 2953.28,4025 X17.4
PH_S3: P8.14 X20.4 | length 4221.5
  Bottom Layer w10: P8.14 430,2655 430,3235.29 1050.71,3856 2812,3856 3343,3325 X20.4@3375,3325
PH_TEM+: P9.1
PH_TEM-: P8.16
PH_TR1: P8.1
PH_TR2: P9.16
PWR_A_0: X13.12 X25.1 | length 4536.5
  Top Layer w50: X25.1 388.72,5682.72 581,5875 1129,5875 1722,5282 1722,3555 v1@1844,3433
  Bottom Layer w50: v1(1747,3530) 1868,3409 2380,3409 2450,3479 X13.12
  other v1: 1843,3432 1819,3457 1795,3481 1770,3505
PWR_DIG_0: X13.41 X28.1 | length 4511.2
  Bottom Layer w50: X13.41 2850,1082 2908,1140 3015,1140 3504,651 6891.04,651 X28.1
PWR_DRIV_1: X3.6 X10.6 X16.6 X19.6 X28.2 | length 5575
  Top Layer w50: X28.2 7081,949 7296,1164 7296,5560 7156,5700 X19.6 ; X3.6 7285,2850 ; X10.6 7293,3800 ; X16.6 7285,4750
PWR_DRIV_2: X1.9 X3.2 X8.9 X10.2 X11.9 X14.9 X16.2 X17.9 X19.2 X20.9 X28.3 | length 12648.7
  Top Layer w20: X20.9@3946.5,3503.5 4029,3586 4029,4146 X17.9 4042,4317 4042,4911 4003,4950 X14.9 ; X20.9 4041,3409 4041,2866 X11.9 4034,2691 4034,2134 X8.9 4045,1955 4045,1420 X1.9 3876,1251 3876,993 4097,772 v1(4592,772)
  Top Layer w50: X28.3 7218,1310.04 7218,2088 6985,2321 6985,2449 ; X3.2 6986,2450 6985,2449 ; X10.2 6985,3400 ; X16.2 6985,4350 ; X19.2 7051,5300 6985,5234 6985,4350 ; 6985,2449 6985,3400 ; 6985,3400 6985,4350
  Bottom Layer w20: v1@4588,773 6246,773 6707,1234 6904.04,1234 X28.3
PWR_OB_HIGH: P5.1 P6.1 X25.2 | length 2296.1
  Top Layer w50: X25.2 506.13,5088.13 344,4926 P5.1 344,4329 413,4260 1061,4260 1137,4336 P6.1
PWR_OB_LOW: P5.3 P6.3 X25.3 | length 2309.3
  Top Layer w50: X25.3 623.54,5057.54 544,4978 P5.3 806,4391 907,4492 1276,4492 1337,4431 P6.3
PWR_RELAY: REL1.1 REL3.1 REL4.1 REL5.1 X27.1 | length 14304.6
  Top Layer w20: REL1.1 789,1186 789,365 970,184 6719,184 6915,380 6915,1410.96 X27.1 ; REL3.1 5092,5336 5020,5408 5020,5796 REL4.1
  Top Layer w50: X27.1 X27.1@7051.96,1518.96
  Bottom Layer w50: REL3.1 5324,4751 6282,3793 6282,1982 ; REL5.1 6282,1982 ; X27.1 6913,1628.96 6913,1915 6846,1982 6282,1982
PWR_STEP-UP: X23.1 X24.1 X26.1 X27.2 | length 6838.1
  Top Layer w50: v1(5744,4106) 5780,4106 5916,4242 v1(5916,4243) ; X27.2@7002,1685 X27.2
  Bottom Layer w50: X23.1 5422,4106 v1(5744,4106) ; X24.1 5525,5021 5699,4847 5699,4460.85 6342,3817.85 6342,2249 6549,2042 6965.06,2042 7131,1876.06 7131,1678 ; X26.1 6695,1384 7070,1384 7131,1445 7131,1678 ; X27.2 7124,1685 7131,1678
VINB: P14.2 X13.2 | length 1528.7
  Top Layer w20: P14.2 1995,4247 2313,4247 2900.47,3659.53 2900.47,3574.53 X13.2
VING: P1.1 REL1.6 X13.6 | length 4913.4
  Top Layer w50: v1(1001,907) 1414,907 2750,2243 X13.6
  Bottom Layer w50: P1.1 329,1027 449,907 639,907 ; REL1.6 638.4,907.6 639,907 ; v1(1001,907) 639,907
VINR: P3.2 REL1.3 X13.18 | length 3472.2
  Top Layer w50: P3.2 601,1828 638.4,1790.6 638.4,1335.4 ; REL1.3 638.4,1335.4 ; X13.18 2150,2847 638.4,1335.4
pads on no net: REL3.2 REL3.7 REL4.2 REL4.7 REL5.2 REL5.7 X5.1 X5.17 X5.18 X5.19 X5.25 X5.35 X5.37 X6.1 X6.2 X6.3 X6.4 X6.5 X6.9 X6.17 X6.18 X6.19 X6.20 X6.21 X6.22 X6.23 X6.25 X6.27 X6.28 X6.35 X6.36 X6.37 X22.3 X27.3

## Polygon pours and split planes (outlines as drawn)
GND on Bottom Layer "Top Layer-No Net" (hatched 45Degree grid 20 track 8, remove dead copper, pour order 3): 50,6100 50,50 7325,50 7325,6100

## Keep-outs
Keep-Out Layer:
  lines w10: 0,0 7375,0 7375,6150 89,6150 88,6151 88,6229 89,6230 3550,6230 3550,8834 0,8834 0,6150 0,0

## Silkscreen, mask and mechanical layers (free items; w line width, h text height)
Top Overlay:
  text "FPPZ-1024M_DOSE" at 1775,8405 h118.11
  text "NTK-4-MECH-VPL" at 1775,6513 h118.11
  text "FPPZ-1024M_DOSE" at 5842,4025 h118.11 r90
  text "MOTHERBOARD NTK-4 MECH VPL" at 1775,2034.89 h60 r90

## Text inside footprints (layer, text, board x,y; h text height)
X22: Top Overlay "Amper" at 5392.79,3168.83 h24.61; Top Overlay "Voltage" at 5558.14,3168.83 h24.61